# EAGLE board newbrd (EAGLE 7.6.0)
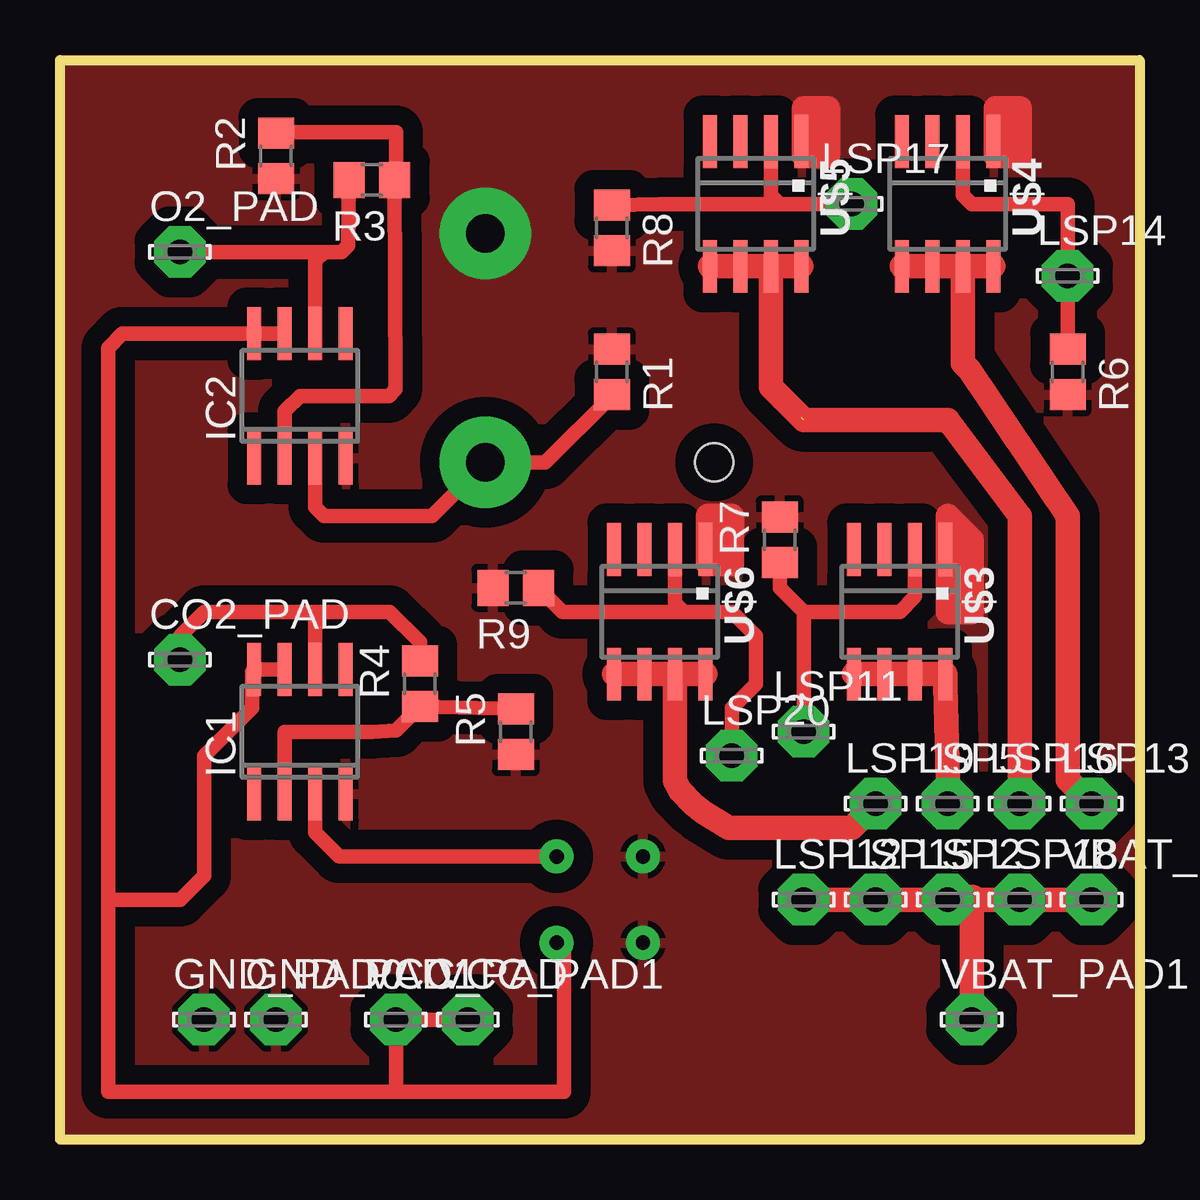
[diagram p0: board, top side]
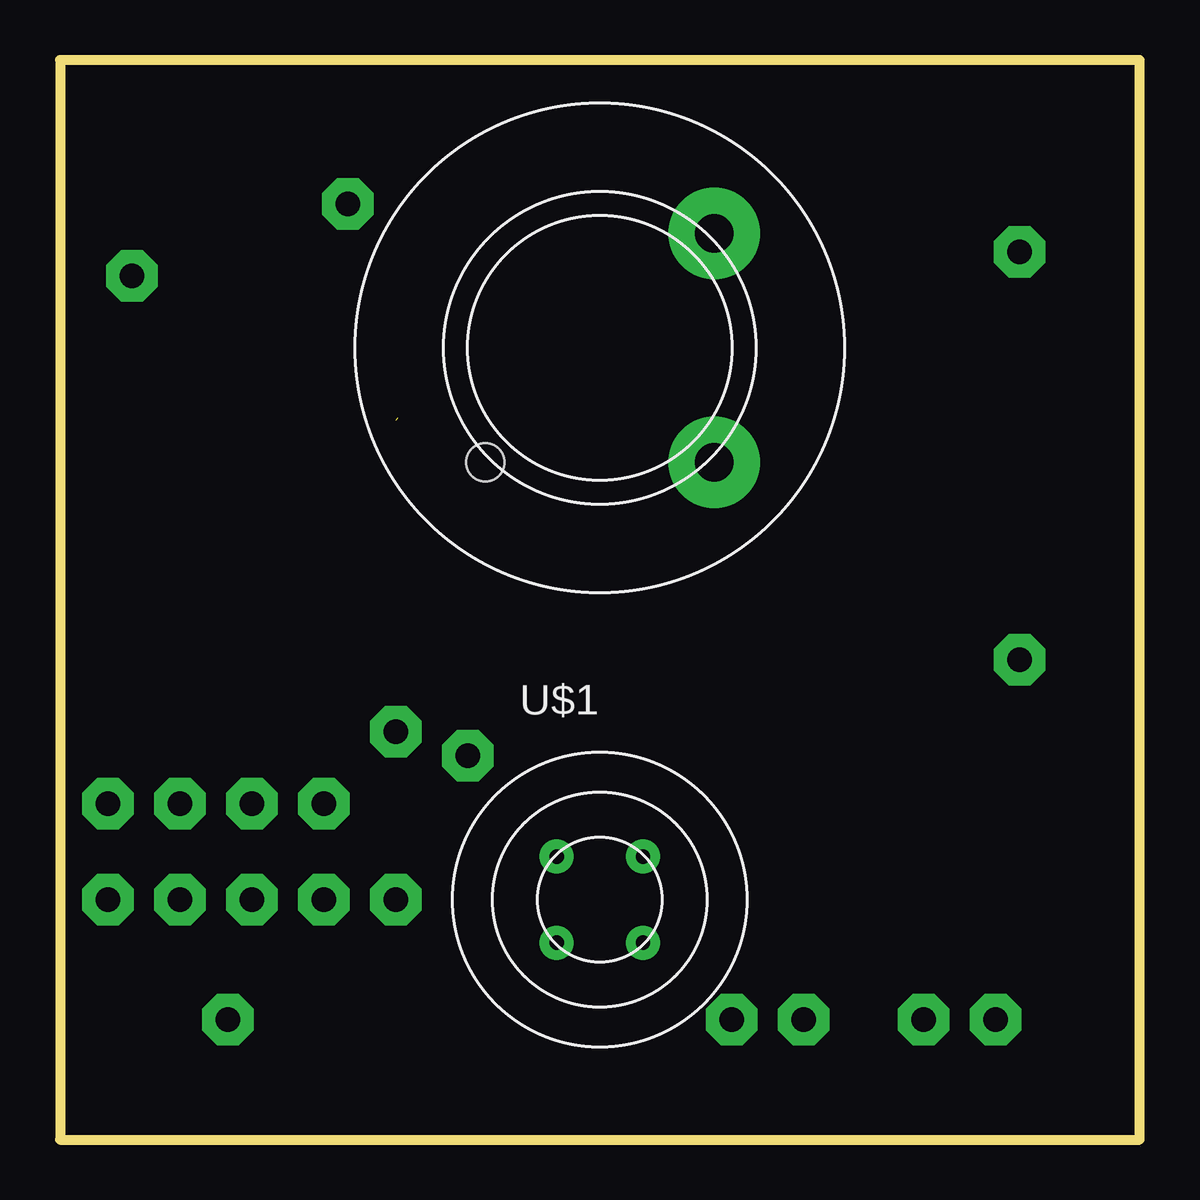
[diagram p1: board, bottom side, seen from below]

Size 45 x 45 mm. Coordinates in mm from the lower left corner, seen from the top.
Outline: 0,0 0,45 45,45 45,0 0,0
Copper layers (1*16): Top 0.035mm / dielectric 1.5mm / Bottom 0.035mm
Design rules "default *": minimum track width 10mil, minimum drill 24mil, track to track 8mil, track to pad 8mil, pad to pad 8mil, via to via 8mil, smd to smd 8mil, copper to edge 0mil, drill to drill 8mil, minimum pad ring 10mil, minimum via ring 8mil, stop-mask expansion 4mil, vias tented up to drill 0mil, thermal gap 10mil

## Footprints (pad centres in the part's own frame; a part is rotated, then mirrored left to right if it is on the bottom)
LSP10 = drill 1.016 pad 2.159 octagon: MP 0,0
SO08 = smd 0.6 x 2.2: 1 -1.905,-2.6; 2 -0.635,-2.6; 3 0.635,-2.6; 4 1.905,-2.6; 5 1.905,2.6; 6 0.635,2.6; 7 -0.635,2.6; 8 -1.905,2.6
R0805 = smd 1.3 x 1.5: 1 -0.95,0; 2 0.95,0
TGS4161 = drill 0.6 pad 1.422: 1 1.8,-1.8; 2 1.8,1.8; 3 -1.8,1.8; 4 -1.8,-1.8
O2-A2 = drill 1.6 pad 3.81: GND 6.75,0; VOUT 0,-6.75 | hole 1.6: -6.75,0
SOIC-8 = smd 0.6 x 2.2: 1 -1.905,-2.6; 2 -0.635,-2.6; 3 0.635,-2.6; 4 1.905,-2.6; 5 1.905,2.6; 6 0.635,2.6; 7 -0.635,2.6; 8 -1.905,2.6

## Placement (x,y rotation side)
CO2_PAD  LSP10  [LSP10]  5,20 0 top
GND_PAD0  LSP10  [LSP10]  6,5 0 top
GND_PAD1  LSP10  [LSP10]  9,5 0 top
IC1  TLC271D  [SO08]  10,17 0 top
IC2  TLC271D  [SO08]  10,31 0 top
LSP2  LSP10  [LSP10]  37,10 0 top
LSP5  LSP10  [LSP10]  37,14 0 top
LSP11  LSP10  [LSP10]  31,17 0 top
LSP12  LSP10  [LSP10]  31,10 0 top
LSP13  LSP10  [LSP10]  43,14 0 top
LSP14  LSP10  [LSP10]  42,36 0 top
LSP15  LSP10  [LSP10]  34,10 0 top
LSP16  LSP10  [LSP10]  40,14 0 top
LSP17  LSP10  [LSP10]  33,39 0 top
LSP18  LSP10  [LSP10]  40,10 0 top
LSP19  LSP10  [LSP10]  34,14 0 top
LSP20  LSP10  [LSP10]  28,16 0 top
O2_PAD  LSP10  [LSP10]  5,37 0 top
R1  [R0805]  23,32 270 top
R2  [R0805]  9,41 90 top
R3  [R0805]  13,40 180 top
R4  [R0805]  15,19 90 top
R5  [R0805]  19,17 90 top
R6  [R0805]  42,32 270 top
R7  [R0805]  30,25 90 top
R8  [R0805]  23,38 270 top
R9  [R0805]  19,23 180 top
U$1  TGS4161  [TGS4161]  22.5,10 0 bottom
U$2  O2-A2  [O2-A2]  22.5,33 45 bottom
U$3  AO4606  [SOIC-8]  35,22 180 top
U$4  AO4606  [SOIC-8]  37,39 180 top
U$5  AO4606  [SOIC-8]  29,39 180 top
U$6  AO4606  [SOIC-8]  25,22 180 top
VBAT_PAD  LSP10  [LSP10]  43,10 0 top
VBAT_PAD1  LSP10  [LSP10]  38,5 0 top
VCC_PAD  LSP10  [LSP10]  14,5 0 top
VCC_PAD1  LSP10  [LSP10]  17,5 0 top

## Library data of the parts
CO2_PAD GND_PAD0 GND_PAD1 LSP2 LSP5 LSP11-LSP20 O2_PAD VBAT_PAD VBAT_PAD1 VCC_PAD VCC_PAD1 = solpad
IC1 IC2 = linear
R1-R9 = resistor
U$1 U$2 = datchiki
U$3-U$6 = elements

## Nets
GND: GND_PAD0.MP GND_PAD1.MP IC1.4 IC2.4 R1.1 R2.1 R5.1 R6.2 R7.2 R8.2 R9.2 U$1.3 U$1.4 U$2.GND U$3.1 U$4.1 U$5.1 U$6.1
N$1: IC2.3 R1.2 U$2.VOUT
N$3: IC2.2 R2.2 R3.1
N$4: IC2.6 O2_PAD.MP R3.2
N$5: IC1.3 U$1.2
N$6: CO2_PAD.MP IC1.6 R4.2
N$7: LSP2.MP LSP12.MP LSP15.MP LSP18.MP VBAT_PAD1.MP VBAT_PAD.MP
N$8: LSP5.MP U$3.5 U$3.6 U$3.7 U$3.8
N$9: IC1.2 R4.1 R5.2
N$10: LSP11.MP R7.1 U$3.2
N$12: LSP13.MP U$4.5 U$4.6 U$4.7 U$4.8
N$13: LSP14.MP R6.1 U$4.2
N$15: LSP16.MP U$5.5 U$5.6 U$5.7 U$5.8
N$16: LSP17.MP R8.1 U$5.2
N$18: LSP19.MP U$6.5 U$6.6 U$6.7 U$6.8
N$19: LSP20.MP R9.1 U$6.2
VCC: IC1.7 IC1.8 IC2.7 IC2.8 U$1.1 VCC_PAD1.MP VCC_PAD.MP

## Tracks (layer width: path | path; a pad name or v marks a point on that pad's centre or on a via)
GND
  Top 1.016: 28,24 27,24 27,26 28,26 28,24 | 38,22 37,22 37,26 38,25 38,22 | 40,41 39,41 39,43 40,43 40,41 | 32,41 31,41 31,43 32,43 32,41
  pour Top (isolate 0.813): 0,45 0,0 45,0 45,45
N$1
  Top 0.61: R1.2 23,31 20.23,28.23 U$2.VOUT 15.5,26 11,26 10.63,26.36 IC2.3
N$3
  Top 0.61: IC2.2 9.37,30.36 10,31 13.72,31 13.99,31.28 R3.1 14,40.05 14,42 9,42 R2.2
N$4
  Top 0.61: R3.2 12.01,37.26 11.74,37 11,37 | 11,37 10.63,36.63 IC2.6 | O2_PAD.MP 11,37
N$5
  Top 0.61: U$1.2 11.63,11.8 10.63,12.8 IC1.3
N$6
  Top 0.61: CO2_PAD.MP 5,21 6,22 10.63,22 | 10.63,22 IC1.6 | R4.2 15,20.73 13.73,22 10.63,22
N$7
  Top 1.016: VBAT_PAD.MP LSP18.MP 38,10 VBAT_PAD1.MP | LSP2.MP LSP15.MP LSP12.MP
  Top 1.27: 38,10 LSP2.MP
N$8
  Top 1.016: LSP5.MP 37,15 36.91,18.91 U$3.8 U$3.7 U$3.6 U$3.5
N$9
  Top 0.61: R5.2 R4.1 14,17.05 13,17 9.37,17 IC1.2
N$10
  Top 0.61: LSP11.MP 31,22 | 31,22 35,22 35.63,22.64 U$3.2 | 31,22 30,23 R7.1
N$12
  Top 1.016: LSP13.MP 42,15 42,26 37.91,32.09 37.63,32.37 U$4.7 | U$4.7 U$4.8 | U$4.7 U$4.6 U$4.5
N$13
  Top 0.61: R6.1 LSP14.MP 42,39 38,39 37.63,39.37 U$4.2
N$15  (1 unrouted)
  Top 1.016: LSP16.MP 40,26 37,30 31,30 | 30.91,30.09 29.64,31.36 U$5.7 | U$5.7 U$5.8 | U$5.7 U$5.6 U$5.5
N$16
  Top 0.61: LSP17.MP 30,39 | 30,39 29.64,39.37 U$5.2 | R8.1 25.05,39 30,39
N$18
  Top 1.016: U$6.7 U$6.8 | LSP19.MP 33,13 27.88,13 26.82,13.63 26.4,13.97 25.85,14.54 25.64,14.95 U$6.7 | U$6.7 U$6.6 U$6.5
N$19
  Top 0.61: 26,22 28,22 29,21 29,19 28,18 LSP20.MP | 26,22 25.64,22.36 U$6.2 | R9.1 20.95,22 26,22
VCC
  Top 0.406: U$1.1 21,8.2
  Top 0.61: IC1.7 IC1.8 8,19.5 8,18 6,16 6,11 5,10 2,10 | IC2.7 IC2.8 2.6,33.6 2,33 2,10 | 14,2 VCC_PAD.MP VCC_PAD1.MP | 14,2 21,2 21,8.2 | 14,2 2,2 2,10